# EAGLE board master_node_1284p (EAGLE 6.5.0)
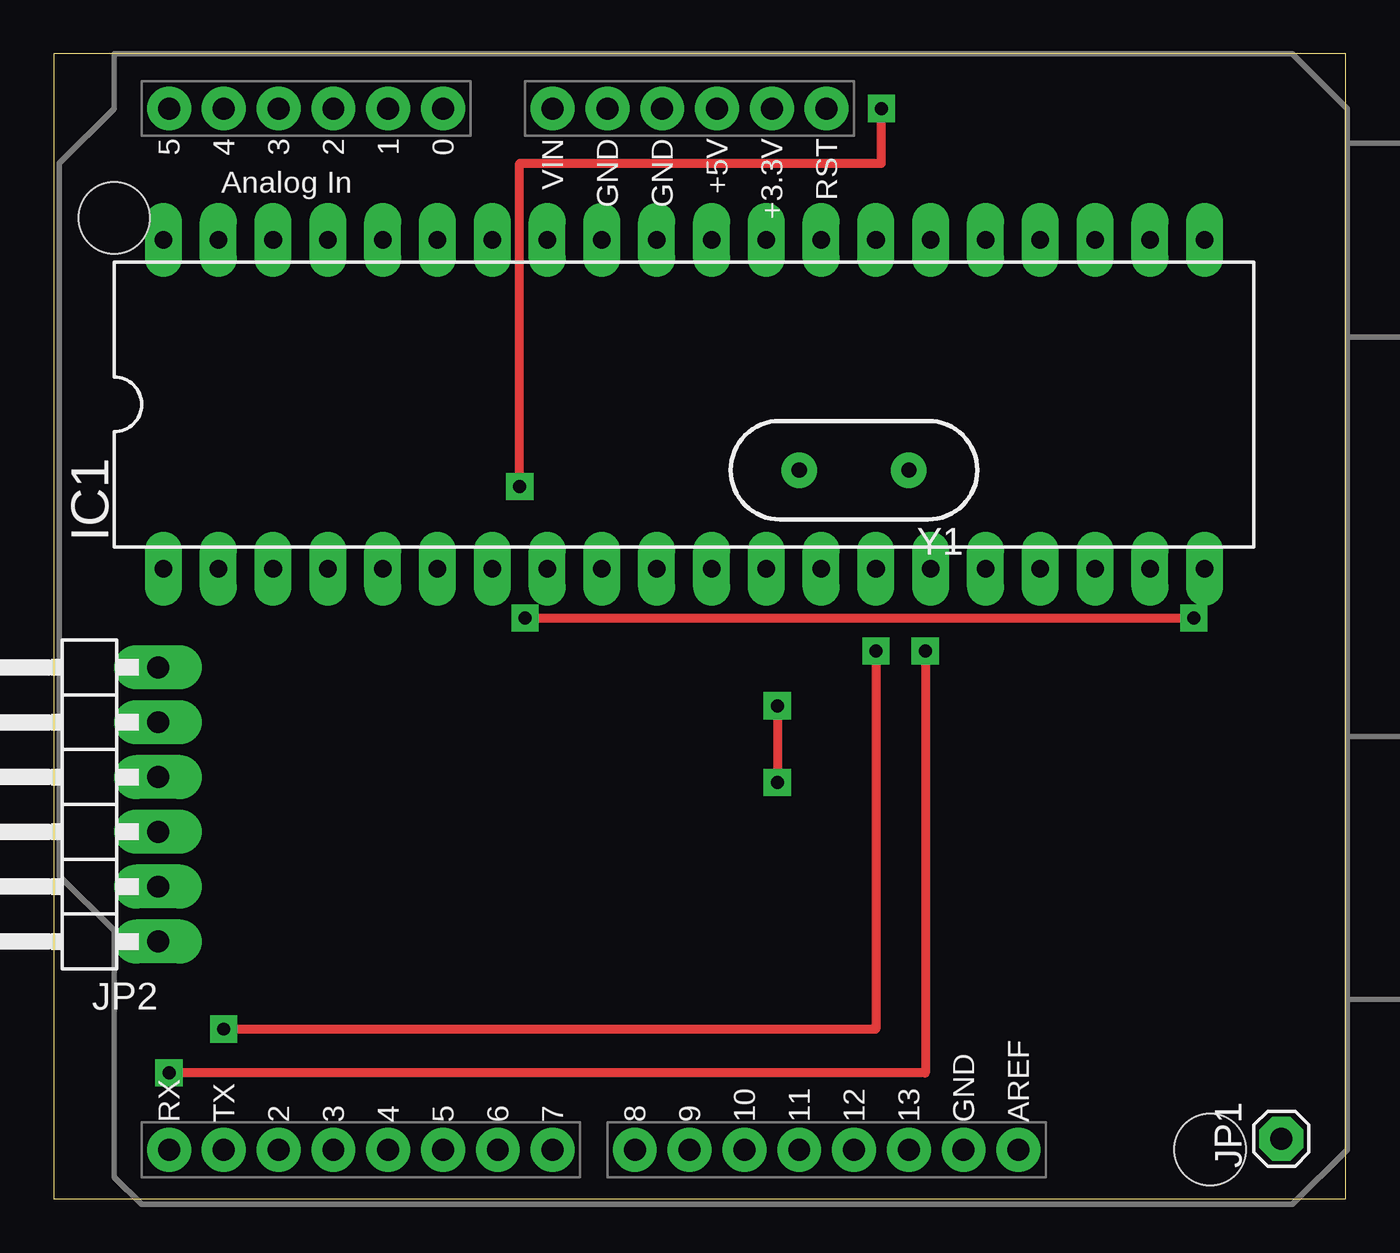
[diagram p0: board, top side]
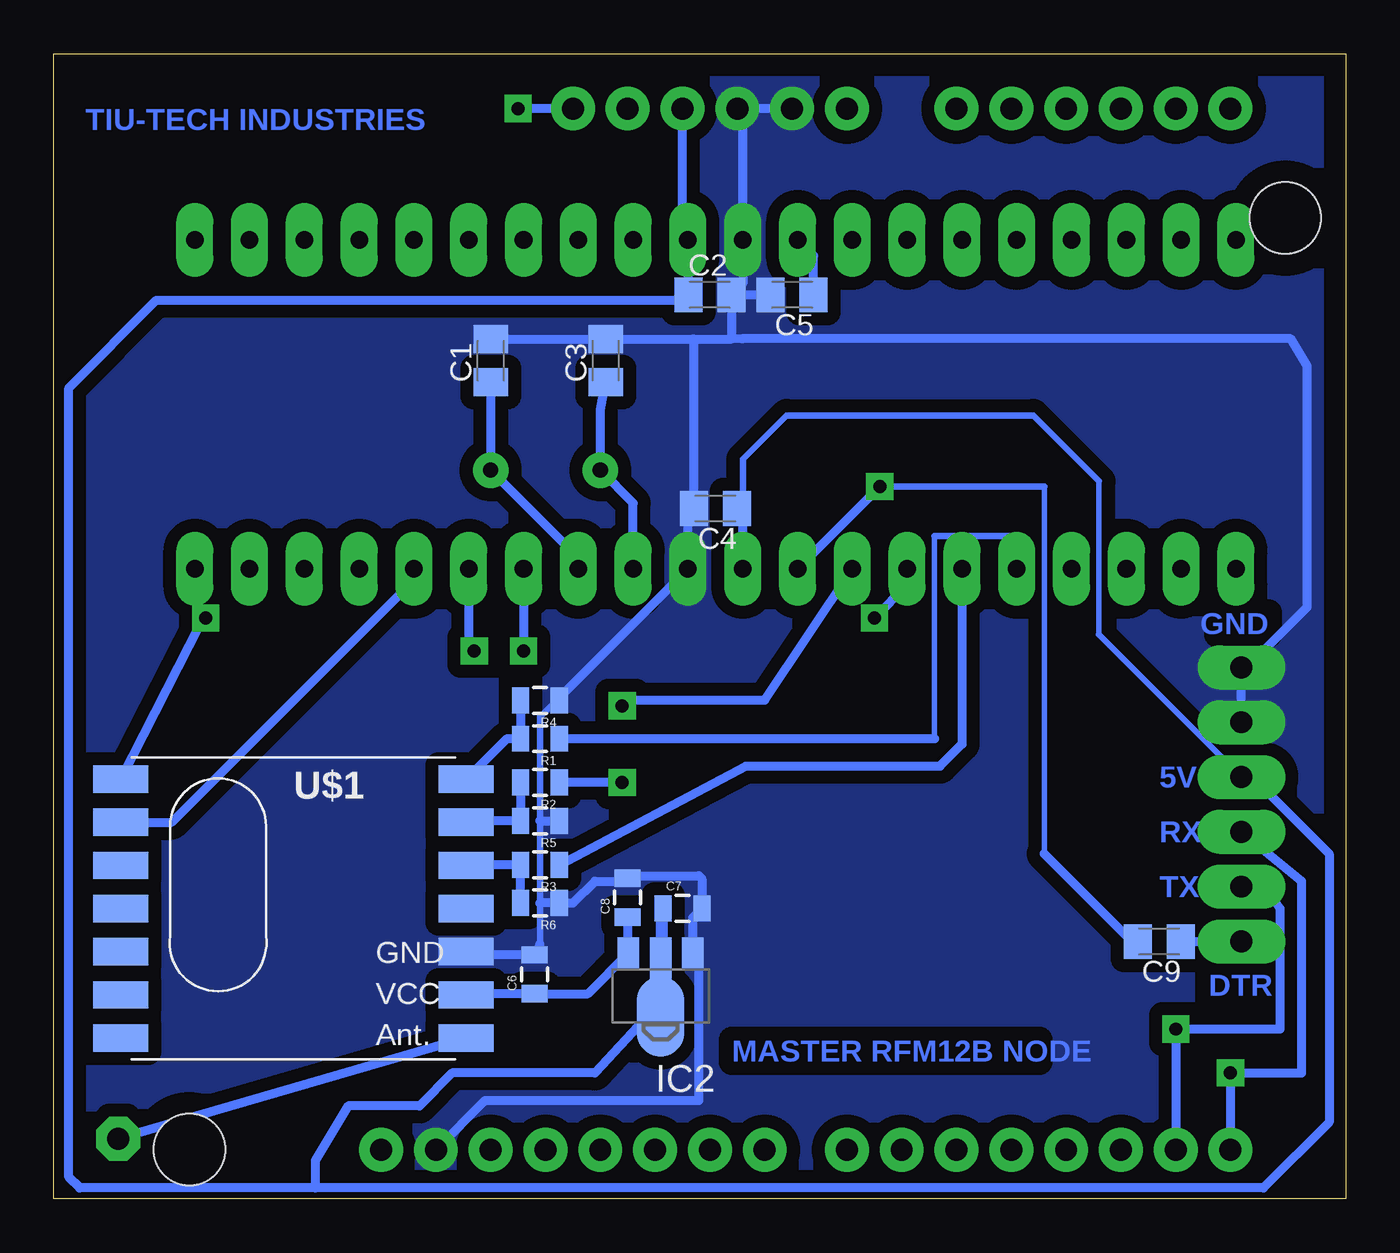
[diagram p1: board, bottom side, seen from below]

Size 59.87 x 53.08 mm. Coordinates in mm from the lower left corner, seen from the top.
Outline: 0,0 59.87,0 59.87,53.08 0,53.08 0,0
Copper layers (1*16): Top 0.035mm / dielectric 1.5mm / Bottom 0.035mm
Design rules "default *": minimum track width 10mil, minimum drill 24mil, track to track 8mil, track to pad 8mil, pad to pad 8mil, via to via 8mil, smd to smd 8mil, copper to edge 40mil, drill to drill 8mil, minimum pad ring 10mil, minimum via ring 8mil, stop-mask expansion 4mil, vias tented up to drill 0mil, thermal gap 10mil

## Footprints (pad centres in the part's own frame; a part is rotated, then mirrored left to right if it is on the bottom)
C0805K = smd 1.3 x 1.6: 1 -1,0; 2 1,0
0805 = smd 0.8 x 1.2: 1 -0.9,0; 2 0.9,0
DIL40 = drill 0.813 long: 1 -24.13,-7.62; 2 -21.59,-7.62; 3 -19.05,-7.62; 4 -16.51,-7.62; 5 -13.97,-7.62; 6 -11.43,-7.62; 7 -8.89,-7.62; 8 -6.35,-7.62; 9 -3.81,-7.62; 10 -1.27,-7.62; 11 1.27,-7.62; 12 3.81,-7.62; 13 6.35,-7.62; 14 8.89,-7.62; 15 11.43,-7.62; 16 13.97,-7.62; 17 16.51,-7.62; 18 19.05,-7.62; 19 21.59,-7.62; 20 24.13,-7.62; 21 24.13,7.62; 22 21.59,7.62; 23 19.05,7.62; 24 16.51,7.62; 25 13.97,7.62; 26 11.43,7.62; 27 8.89,7.62; 28 6.35,7.62; 29 3.81,7.62; 30 1.27,7.62; 31 -1.27,7.62; 32 -3.81,7.62; 33 -6.35,7.62; 34 -8.89,7.62; 35 -11.43,7.62; 36 -13.97,7.62; 37 -16.51,7.62; 38 -19.05,7.62; 39 -21.59,7.62; 40 -24.13,7.62
MCP1703-SOT89 = smd 1 x 1.5: GND -1.499,-1.981; VOUT 1.499,-1.981 | smd 2.2 x 3.7: VIN1 0,0.94 | smd 1 x 2: VIN2 0,-1.727
1X01 = drill 1.016 octagon: 1 0,0
1X06/90 = drill 1.016 long: 1 -6.35,-3.81; 2 -3.81,-3.81; 3 -1.27,-3.81; 4 1.27,-3.81; 5 3.81,-3.81; 6 6.35,-3.81
DUEMILANOVE_SHIELD = drill 1.016 pad 1.88: 3.3V 50.8,26.67; 5V 50.8,29.21; A0 50.8,41.91; A1 50.8,44.45; A2 50.8,46.99; A3 50.8,49.53; A4 50.8,52.07; A5 50.8,54.61; AREF 2.54,15.24; D2 2.54,49.53; D3 2.54,46.99; D4 2.54,44.45; D5 2.54,41.91; D6 2.54,39.37; D7 2.54,36.83; D8 2.54,33.02; D9 2.54,30.48; D10 2.54,27.94; D11 2.54,25.4; D12 2.54,22.86; D13 2.54,20.32; GND@0 50.8,31.75; GND@1 50.8,34.29; GND@2 2.54,17.78; RES 50.8,24.13; RX 2.54,54.61; TX 2.54,52.07; VIN 50.8,36.83 | hole 3.302: 45.72,57.15; 2.54,6.35
RFM12B = smd 2.54 x 1.27: ANT 8,-6; FFS -8,2; GND 8,-2; IRQ -8,4; P$8 -8,0; P$9 -8,-2; P$10 -8,-4; P$12 -8,-6; P$16 8,0; SCK 8,4; SDI 8,2; SDO -8,6; SEL 8,6; VDD 8,-4
HC49US = drill 0.7 pad 1.651: 1 -2.54,0; 2 2.54,0

## Placement (x,y rotation side)
C1  22p  [C0805K]  39.62,38.86 90 bottom
C2  100n  [C0805K]  29.46,41.91 0 bottom
C3  22p  [C0805K]  34.29,38.86 90 bottom
C4  100n  [C0805K]  29.21,32 180 bottom
C5  100n  [C0805K]  25.65,41.91 180 bottom
C6  1u  [0805]  37.59,10.41 90 bottom
C7  1u  [0805]  30.73,13.46 0 bottom
C8  1u  [0805]  33.27,13.97 90 bottom
C9  100n  [C0805K]  8.64,11.94 180 bottom
IC1  ATMEGA644-20PU  [DIL40]  29.21,36.83 0 top
IC2  MCP1703-3V3  [MCP1703-SOT89]  31.75,9.4 180 bottom
JP1  ANT  [1X01]  56.9,2.79 90 top
JP2  PROGRAMMER  [1X06/90]  1.02,18.29 90 top
R1  4K7  [0805]  37.34,21.34 180 bottom
R2  4K7  [0805]  37.34,19.3 180 bottom
R3  4K7  [0805]  37.34,15.49 180 bottom
R4  10K  [0805]  37.34,23.11 180 bottom
R5  10K  [0805]  37.34,17.53 180 bottom
R6  10K  [0805]  37.34,13.72 180 bottom
U1  ARDUINO_SHIELDLABEL  [DUEMILANOVE_SHIELD]  59.94,-0.25 90 top
U$1  RFM12B  [RFM12B]  48.77,13.46 0 bottom
Y1  16MHz  [HC49US]  37.08,33.78 180 top

## Library data of the parts
C1-C5 C9 = resistor
C6-C8 = SparkFun-Passives
IC1 = atmel; MPN: ATMEGA644-20PU; OC_FARNELL: 1288340; OC_NEWARK: 23M5060
IC2 = MCP1703_SOT89
JP1 JP2 = pinhead
R1-R6 = SparkFun-Resistors
U1 = SparkFun-Boards
U$1 = JeeParts
Y1 = SparkFun-FreqCtrl

## Nets
5VCC: C2.1 C4.1 C7.1 IC1.10 IC1.30 IC2.VIN1 IC2.VIN2 JP2.4 U1.5V
+3V3: C6.1 C8.1 IC2.VOUT U$1.VDD
DTR: C9.1 JP2.1
GND: C1.2 C2.2 C3.2 C4.2 C5.2 C6.2 C7.2 C8.2 IC1.11 IC1.31 IC2.GND JP2.5 JP2.6 R4.1 R5.1 R6.1 U1.GND@0 U1.GND@1 U1.GND@2 U$1.GND
IRQ: IC1.16 U$1.IRQ
MISO: IC1.7 U$1.SDO
MOSI: IC1.6 R3.1
N$7: JP1.1 U$1.ANT
N$18: C5.1 IC1.32
N$35: R3.2 R6.2 U$1.SDI
N$36: R2.2 R5.2 U$1.SCK
N$37: R1.2 R4.2 U$1.SEL
RESET: C9.2 IC1.9 U1.RES
RX: IC1.15 JP2.3 U1.RX
SCK: IC1.8 R2.1
SS: IC1.5 R1.1
TX: IC1.14 JP2.2 U1.TX
XTAL1: C1.1 IC1.13 Y1.1
XTAL2: C3.1 IC1.12 Y1.2

## Tracks (layer width: path | path; a pad name or v marks a point on that pad's centre or on a via)
5VCC
  Bottom 0.254: 11.43,33.27 11.43,26.16
  Bottom 0.305: 27.94,32.27 27.94,34.29 25.91,36.32 14.48,36.32 11.43,33.27 | 11.43,26.16 JP2.4
  Bottom 0.406: IC1.10 27.94,31.99 C4.1 27.94,32.27 | IC2.VIN1 IC2.VIN2 31.75,13.35 C7.1 31.63,9.26 34.8,5.84 41.4,5.84 42.93,4.32 46.23,4.32 47.75,1.78 47.75,0.51 | JP2.4 4.32,19.56 0.76,16 0.76,3.56 3.81,0.51 47.75,0.51 | 47.75,0.51 58.67,0.51 59.18,1.02 59.18,37.59 55.12,41.66 30.72,41.66 | 30.72,41.66 C2.1 30.46,44.43 IC1.30 30.73,44.7 U1.5V | 30.72,41.66 30.48,41.66
+3V3
  Bottom 0.406: U$1.VDD 40.72,9.51 C6.1 35.11,9.51 IC2.VOUT 33.25,13.04 C8.1
DTR
  Bottom 0.406: C9.1 JP2.1
GND
  Bottom 0.305: 36.58,23.11 37.34,22.35 37.34,17.53 37.34,13.72 37.34,11.82
  Bottom 0.406: U$1.GND 40.62,11.31 C6.2 37.34,11.82 | 37.34,13.72 R6.1 35.81,13.72 34.8,14.73 33.41,14.73 C8.2 33.16,14.99 29.97,14.99 29.83,14.85 C7.2 30.25,13.04 IC2.GND 30.28,11.38 29.97,11.43 29.97,4.57 39.88,4.57 U1.GND@2 | 37.34,17.53 R5.1 | 36.58,23.11 R4.1 36.44,23.25 IC1.11 30.48,31.73 C4.2 30.21,39.85 30.23,39.86 | C1.2 C3.2 30.23,39.86 | C2.2 C5.2 | C2.2 27.94,42.43 IC1.31 27.94,50.29 U1.GND@0 U1.GND@1 | JP2.5 JP2.6 4.57,24.64 1.78,27.43 1.78,38.61 2.54,39.88 27.97,39.88 28.46,39.86 | 30.23,39.86 28.46,39.86 | 28.46,39.86 28.45,39.88 28.45,41.89 C2.2
  pour Bottom (isolate 0.61, no thermals): 0.25,52.83 59.94,52.83 59.94,0 0.25,0
IRQ
  Bottom 0.406: U$1.IRQ 54.42,17.46 43.18,28.7 IC1.16
MISO  (via drill 0.6)
  Top 0.406: v21.84,26.92 v52.83,26.92
  Bottom 0.406: IC1.7 20.32,28.45 v21.84,26.92 | v52.83,26.92 53.09,26.67 U$1.SDO
MOSI
  Bottom 0.406: R3.1 27.8,20.07 18.8,20.07 17.78,21.08 IC1.6
N$7
  Bottom 0.406: U$1.ANT JP1.1
N$18
  Bottom 0.406: C5.1 24.65,43.7 IC1.32
N$35
  Bottom 0.406: R6.2 R3.2 40.74,15.49 U$1.SDI
N$36
  Bottom 0.406: R2.2 R5.2 40.7,17.53 U$1.SCK
N$37
  Bottom 0.406: R4.2 R1.2 38.86,21.34 40.74,19.46 U$1.SEL
RESET  (via drill 0.6)
  Top 0.406: v21.59,33.02 21.59,48.01 38.35,48.01 v38.35,50.55
  Bottom 0.254: 13.97,16 13.97,33.02
  Bottom 0.305: 13.97,33.02 v21.59,33.02
  Bottom 0.406: IC1.9 v21.59,33.02 | C9.2 9.91,11.94 13.97,16 | U1.RES v38.35,50.55
RX  (via drill 0.6)
  Top 0.406: v40.39,25.4 40.39,5.84 v5.33,5.84
  Bottom 0.406: IC1.15 40.64,25.65 v40.39,25.4 | U1.RX v5.33,5.84 2.03,5.84 2.03,14.73 JP2.3
SCK  (via drill 0.6)
  Top 0.406: v33.53,22.86 v33.53,19.3
  Bottom 0.406: IC1.8 26.92,23.11 33.27,23.11 v33.53,22.86 | v33.53,19.3 R2.1
SS
  Bottom 0.254: 19.05,21.34 19.05,30.73
  Bottom 0.305: 19.05,30.73 15.24,30.73 IC1.5
  Bottom 0.406: R1.1 19.05,21.34
TX  (via drill 0.6)
  Top 0.406: v38.1,25.4 38.1,7.87 v7.87,7.87
  Bottom 0.406: IC1.14 v38.1,25.4 | U1.TX v7.87,7.87 3.05,7.87 3.05,13.46 3.81,14.48 JP2.2
XTAL1
  Bottom 0.406: C1.1 Y1.1 35.56,29.72 IC1.13
XTAL2
  Bottom 0.406: IC1.12 33.02,32.26 Y1.2 34.54,36.59 C3.1

## Text on the board
Bottom: TIU-TECH INDUSTRIES | GND | 5V | RX | TX | DTR | MASTER RFM12B NODE